# Altium PCB PCB.PcbDoc
Units mm, origin at the board's own origin, x right, y up, seen from the top; angles counter-clockwise.
Board outline 50 x 100 mm, 4 copper layers (Top Layer, MID1, MID2, Bottom Layer), stack 1.579 mm thick; 47 components, 38 nets, 220 pads, 108 vias.
Unrouted connection lines stored in the file: 73.
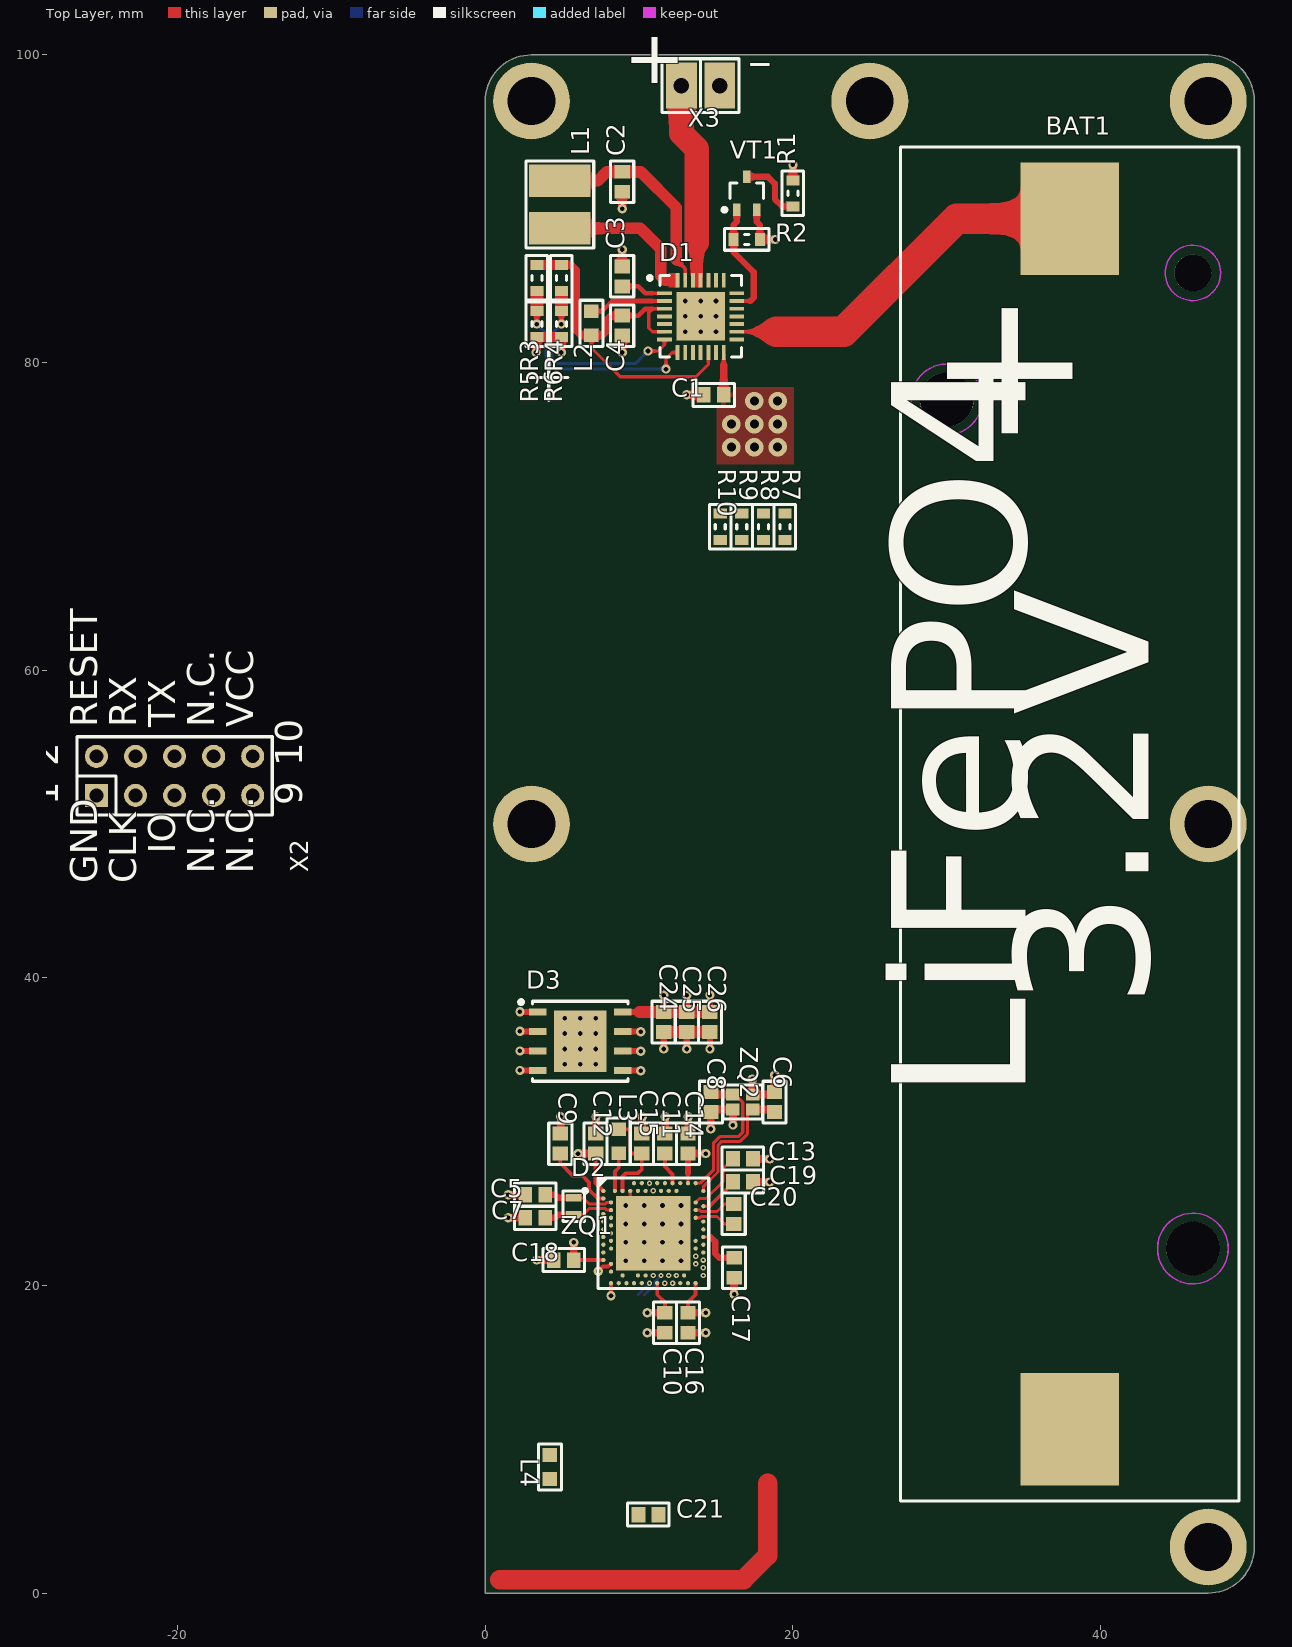
[diagram p0: Top Layer view]
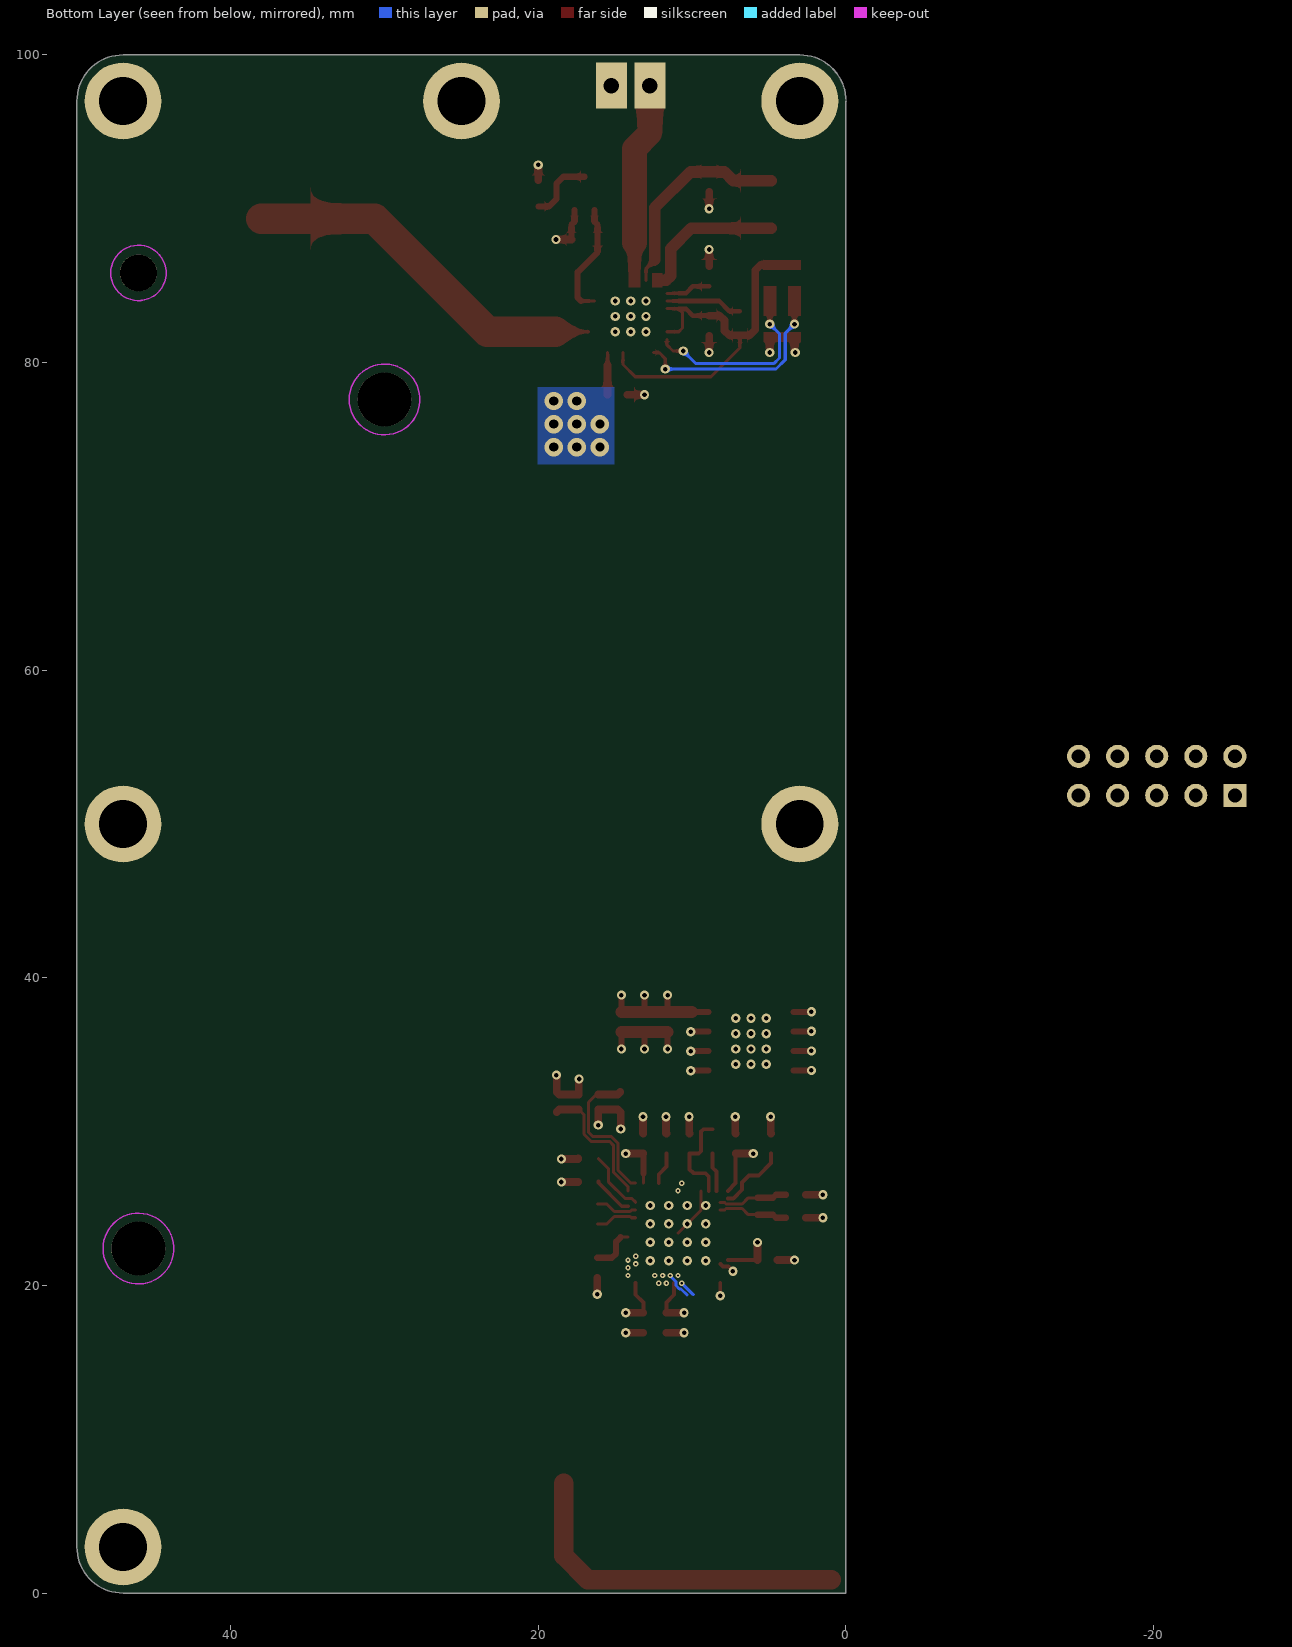
[diagram p1: Bottom Layer view, seen from below]
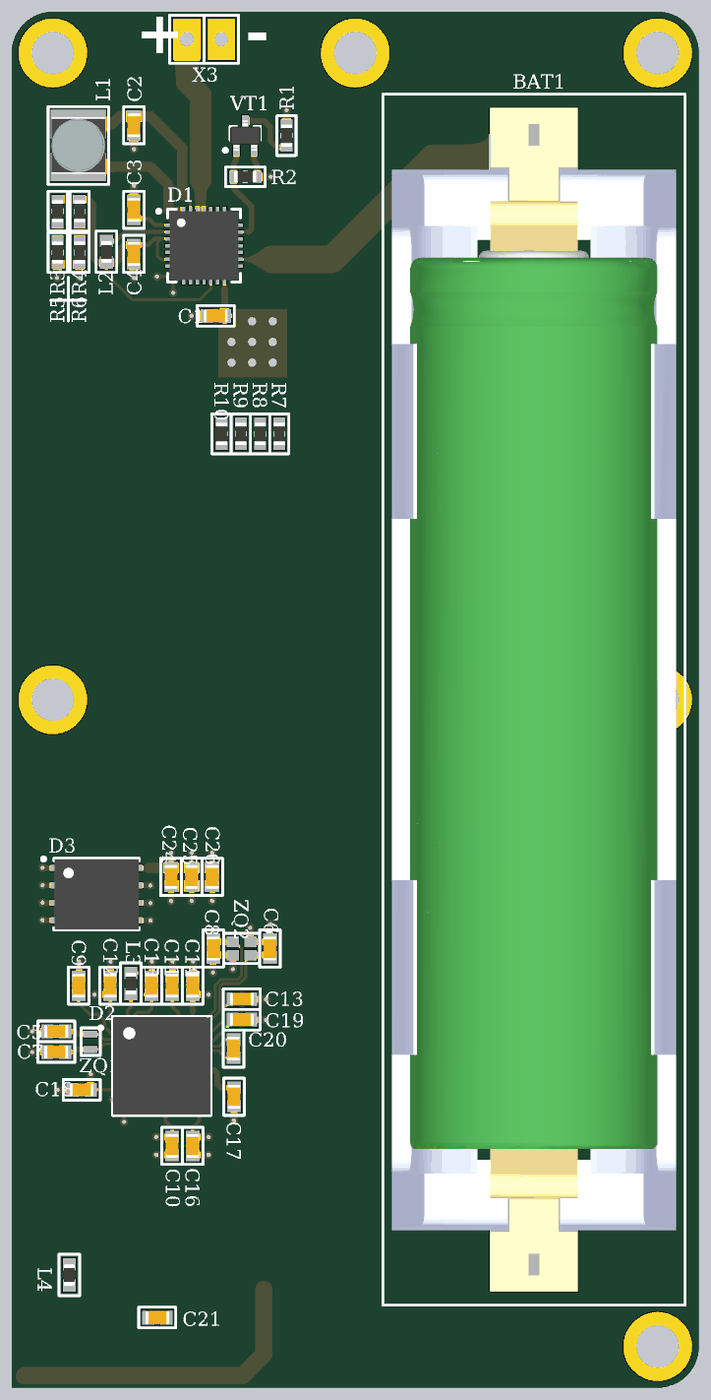
[diagram p2: 3D render of the assembled board from above, using the file's embedded part models]

## Layer stack, top to bottom
Top Solder: solder mask 0.0102, Solder Resist, Dk 3.5
Top Layer: signal copper 0.036
Dielectric 2: prepreg 0.0711, PP-006, Dk 4.1
MID1: signal copper 0.035
Dielectric 1: dielectric 1.295, FR-4, Dk 4.8
MID2: signal copper 0.035
Dielectric 3: prepreg 0.0711, PP-006, Dk 4.1
Bottom Layer: signal copper 0.036
Bottom Solder: solder mask 0.0102, Solder Resist, Dk 3.5

## Board outline
0,0 47,0 ccw(c47,3) 50,3 50,97 ccw(c47,97) 47,100 3,100 ccw(c3,97) 0,97

## Design rules (kind name [scope] priority, off if disabled: settings)
BoardOutlineClearance [All] p1: gap=0.3 ignorepadtopadclearanceinfootprint=FALSE
Clearance Clearance_MultiLayerPad [OnLayer('Multi-Layer') and IsPad] p1: gap=0.2 ignorepadtopadclearanceinfootprint=FALSE except(0: Arc-Hole Track-Hole SMDPad-Hole THPad-Hole Via-Hole Fill-Hole Poly-Hole Region-Hole Text-Hole)
Clearance Clearance_Polygon [InPolygon] p2: gap=0.1 ignorepadtopadclearanceinfootprint=FALSE except(0: Arc-Hole Track-Hole SMDPad-Hole THPad-Hole Via-Hole Fill-Hole Poly-Hole Region-Hole Text-Hole)
Clearance [All] p3: gap=0.1 ignorepadtopadclearanceinfootprint=FALSE except(0: Arc-Hole Track-Hole SMDPad-Hole THPad-Hole Via-Hole Fill-Hole Poly-Hole Region-Hole Text-Hole)
ComponentClearance [All] p1: gap=0.5 collisioncheckmode=3 verticalgap=0.5 showdistances=FALSE
DiffPairsRouting [All] p1: maxlimit=0.3 minlimit=0.1 mostfreqgap=0.15 toplayer_minwidth=0.1 toplayer_maxwidth=0.3 toplayer_prefwidth=0.15 midlayer1_minwidth=0.1 midlayer1_maxwidth=0.3 midlayer1_prefwidth=0.15 midlayer2_minwidth=0.1 midlayer2_maxwidth=0.3 midlayer2_prefwidth=0.15 bottomlayer_minwidth=0.1 bottomlayer_maxwidth=0.3 bottomlayer_prefwidth=0.15 maxuncoupledlength=12.7
Height [All] p1: minheight=0 maxheight=50 prefheight=12.7
HoleSize [All] p1: absolutevalues=TRUE maxlimit=10 minlimit=0.3 maxpercent=80.000 minpercent=20.000
HoleToHoleClearance [All] p1: gap=0.3 allowstackedmicrovias=TRUE
MinimumSolderMaskSliver [All] p1: minsoldermaskwidth=0.2
PlaneClearance [All] p1: clearance=0.5
PlaneConnect [All] p1: planeconnectstyle=Relief reliefexpansion=0.5 reliefentries=4 reliefconductorwidth=0.2 reliefairgap=0.2
PolygonConnect PolygonConnect_PadGND [InNet('GND') and IsPad] p1: connectstyle=Relief reliefconductorwidth=0.2 reliefentries=4 polygonreliefangle="90 Angle" airgapwidth=0.2
PolygonConnect PolygonConnect_Via [IsVia] p2: connectstyle=Direct reliefconductorwidth=0.254 reliefentries=4 polygonreliefangle="90 Angle" airgapwidth=0.254
PolygonConnect [All] p3: connectstyle=Relief reliefconductorwidth=0.2 reliefentries=4 polygonreliefangle="90 Angle" airgapwidth=0.2
RoutingVias [All] p1: holewidth=0.2 width=0.4 viastyle="Through Hole" minholewidth=0.2 minwidth=0.4 maxholewidth=0.5 maxwidth=1.2
SilkToSolderMaskClearance [IsPad] p1: minsilkscreentomaskgap=0.2 clearancetoexposedcopper=TRUE
SolderMaskExpansion [All] p1: expansion=0.075
Width Width_D2_pad [(ObjectKind = 'Pad') And (Component = 'D2')] p1: maxlimit=0.25 minlimit=0.25 preferedwidth=0.25
Width [All] p2: maxlimit=10 minlimit=0.1 preferedwidth=0.1
21 further rules are at their usual default settings.

## Classes and differential pairs
component class Analog: R7 R8 R9 R10
component class Energy_storage: BAT1
component class MPPT_controller: C1 C2 C3 C4 D1 L1 L2 R1 R2 R3 R4 R5 R6 VT1
component class Photovoltaics: X3
component class Power_and_clock: C5 C6 C7 C8 C9 C10 C11 C12 C13 C14 C15 C16 C17 C18 C19 D2 L3 ZQ1 ZQ2
component class Program_and_debug_interface: X2
component class QSPI_64Mbit_Flash: C24 C25 C26 D3
component class RF: C20 C21 L4
net class QSPI_SIO[0..3]: QSPI_SIO0 QSPI_SIO1 QSPI_SIO2 QSPI_SIO3

## Components (designator, comment, footprint, x,y, rotation, side; value= is the part's Value field where it differs from the comment)
BAT1 "\"18650 Batt. holder\"" 18650_smd_keystone_1042 38,50 r90 top
C1 "10 uF" CAPC1608X09N 14.85,77.9 r0 top
C2 "10 uF" CAPC1608X09N 8.9,91.75 r90 top
C3 "22 uF" CAPC1608X09N 8.9,85.6 r270 top
C4 "10 uF" CAPC1608X09N 8.9,82.4 r90 top
C5 "12pF" CAPC1608X09N 3.25,25.9 r0 top
C6 "12pF" CAPC1608X09N 18.8,31.925 r90 top
C7 "12pF" CAPC1608X09N 3.25,24.4 r0 top
C8 "12pF" CAPC1608X09N 14.675,31.925 r270 top
C9 "0.1uF" CAPC1608X09N 4.875,29.225 r90 top
C10 "0.1uF" CAPC1608X09N 11.675,17.575 r90 top
C11 "DNP" CAPC1608X09N 11.675,29.225 r90 top
C12 "1uF" CAPC1608X09N 7.175,29.225 r270 top
C13 "100pF" CAPC1608X09N 16.75,28.25 r0 top
C14 "0.1uF" CAPC1608X09N 13.175,29.225 r270 top
C15 "1uF" CAPC1608X09N 10.175,29.225 r90 top
C16 "0.1uF" CAPC1608X09N 13.175,17.575 r90 top
C17 "820pF" CAPC1608X09N 16.175,21.15 r270 top
C18 "4.7uF" CAPC1608X09N 5.1,21.65 r0 top
C19 "DNP" CAPC1608X09N 16.75,26.75 r0 top
C20 "0.8pF" CAPC1608X09N 16.15,24.65 r270 top
C21 "0.5pF" CAPC1608X09N 10.6,5.1 r180 top
C24 "0.1uF" CAPC1608X09N 11.6,37.125 r90 top
C25 "1uF" CAPC1608X09N 13.1,37.125 r270 top
C26 "4.7uF" CAPC1608X09N 14.6,37.125 r90 top
D1 "" QFN50P500X500X85_HS-29N 14,83 r0 top
D2 "NRF52840-QIAA-R" AQFN50P700X700X85_HS-74N 10.925,23.4 r0 top
D3 "MX25R6435FZNIL0" SON127P600X80_HS-9N 6.175,35.875 r0 top
L1 "10 uH 750 mA" INDP3939X11N 4.85,90.275 r270 top value="10 uH"
L2 "10 uH 250 mA" INDC1608X08N 6.9,82.55 r90 top value="10 uH"
L3 "10 uH 50 mA" INDC1608X08N 8.675,29.375 r270 top value="10 uH"
L4 "4.7nH" INDC1608X08N 4.2,8.2 r270 top
R1 "1M" RESC1608X05N 20,91 r270 top
R2 "1M" RESC1608X05N 17,88 r0 top
R3 "DNP" RESC1608X05N 3.35,85.5 r90 top
R4 "DNP" RESC1608X05N 4.95,85.5 r90 top
R5 "0R" RESC1608X05N 3.35,82.5 r90 top
R6 "0R" RESC1608X05N 4.95,82.5 r90 top
R7 "2M" RESC1608X05N 19.475,69.325 r90 top
R8 "2M" RESC1608X05N 18.075,69.325 r90 top
R9 "5.11M" RESC1608X05N 16.675,69.325 r270 top
R10 "5.11M" RESC1608X05N 15.275,69.325 r270 top
VT1 "DMG1012UW-7" SOT65P210X110-3N 17,91 r90 top
X2 "\"Program connector. Ver.1\"" "10-pin 2.54mm TH" -25.28,51.86 r90 top
X3 "\"Connector\"" "2-pin PCB power" 14,98 r0 top
ZQ1 "32.768 kHz" ECX-16 5.75,25.15 r90 top
ZQ2 "32.0000MHZ" ABM11W-32.0000MHZ-8-D1X-T3 16.738,31.925 r0 top value=32.0000MHz

## Footprints (in the part's own frame and the unit in brackets; to place one, negate y for a bottom-side part, rotate by r counter-clockwise, add the part's x,y. Pads: shape width x height; smd on the part's side, far side on the other; paste and mask are expansions set on the pad)
"2-pin PCB power" [mm]
  rect 2x3 hole 1: 1(-1.25,0) 2(1.25,0)
  silkscreen extent -2.5,-1.75 2.5,1.75
"10-pin 2.54mm TH" [mm]
  rect 1.5x1.5 hole 0.9: 1(0,0)
  round 1.5 hole 0.9: 2(2.54,0) 3(0,-2.54) 4(2.54,-2.54) 5(0,-5.08) 6(2.54,-5.08) 7(0,-7.62) 8(2.54,-7.62) 9(0,-10.16) 10(2.54,-10.16)
  silkscreen extent -1.27,-11.43 3.81,1.27
18650_smd_keystone_1042 [mm]
  round 3.5 hole 3.5 unplated: 0(-27.6,-8) 0(27.6,8)
  round 2.4 hole 2.4 unplated: 0(35.825,-8)
  rect 7.3x6.4 smd: 1(-39.35,0) 2(39.35,0)
  Keep-Out Layer circle w0.1: c27.6,8 r2.3
  Keep-Out Layer circle w0.1: c-27.6,-8 r2.3
  Keep-Out Layer circle w0.1: c35.825,-8 r1.8
  silkscreen extent -44,-11 44,11, body extent -43,-10.32 43,10.33, height 18.1
ABM11W-32.0000MHZ-8-D1X-T3 [mm]
  rect 0.875x0.775 smd: 1(-0.637,0.487) 2(0.637,0.487) 3(0.637,-0.487) 4(-0.637,-0.487)
  silkscreen extent -1.3,-1.1 1.3,1.1, body extent -1,-0.8 1,0.8, height 0.5
AQFN50P700X700X85_HS-74N [mm]
  rect 4.85x4.85 smd mask+0.05: 0(0,0)
  round 0.275 smd paste+0.012 mask+0.05: A8(-1.25,3.25) A10(-0.75,3.25) A12(-0.25,3.25) A14(0.25,3.25) A16(0.75,3.25) A18(1.25,3.25) A20(1.75,3.25) A22(2.25,3.25) A23(2.75,3.25) AA24(3.25,-2.25) AB2(-2.75,-2.5) AC5(-2,-2.75) AC9(-1,-2.75) AC11(-0.5,-2.75) AC13(0,-2.75) AC15(0.5,-2.75) AC17(1,-2.75) AC19(1.5,-2.75) AC21(2,-2.75) AC24(3.25,-2.75) AD2(-2.75,-3.25) AD4(-2.25,-3.25) AD6(-1.75,-3.25) AD8(-1.25,-3.25) AD10(-0.75,-3.25) AD12(-0.25,-3.25) AD14(0.25,-3.25) AD16(0.75,-3.25) AD18(1.25,-3.25) AD20(1.75,-3.25) AD22(2.25,-3.25) AD23(2.75,-3.25) B1(-3.25,2.75) B3(-2.5,2.75) B5(-2,2.75) B7(-1.5,2.75) B9(-1,2.75) B11(-0.5,2.75) B13(0,2.75) B15(0.5,2.75) B17(1,2.75) B19(1.5,2.75) B24(3.25,2.75) C1(-3.25,2.25) D2(-2.75,2) D23(2.75,2) E24(3.25,1.75) F2(-2.75,1.5) F23(2.75,1.5) G1(-3.25,1.25) H2(-2.75,1) H23(2.75,1) J1(-3.25,0.75) J24(3.25,0.75) K2(-2.75,0.5) L1(-3.25,0.25) L24(3.25,0.25) M2(-2.75,0) N1(-3.25,-0.25) N24(3.25,-0.25) P2(-2.75,-0.5) P23(2.75,-0.5) R1(-3.25,-0.75) R24(3.25,-0.75) T2(-2.75,-1) T23(2.75,-1) U1(-3.25,-1.25) U24(3.25,-1.25) V23(2.75,-1.5) W1(-3.25,-1.75) W24(3.25,-1.75) Y2(-2.75,-2) Y23(2.75,-2)
  silkscreen extent -4.56,-3.6 3.6,3.6, body extent -3.55,-3.55 3.55,3.55, height 0.85
CAPC1608X09N [mm] "Chip Capacitor, 2-Leads, Body 1,60x0,80mm, IPC Medium Density"
  rect 0.9x1 smd: 1(-0.65,0) 2(0.65,0)
  silkscreen extent -1.35,-0.75 1.35,0.75, body extent -0.87,-0.48 0.87,0.48, height 0.95
ECX-16 [mm]
  rect 0.5x1 smd: 1(-0.55,0) 2(0.55,0)
  silkscreen extent -1,-0.7 1,0.7, body extent -0.8,-0.5 0.8,0.5, height 0.5
INDC1608X08N [mm] "Chip Inductor, 2-Leads, Body 1,60x0,80mm, IPC Medium Density"
  rect 0.9x0.94 smd: 1(-0.78,0) 2(0.78,0)
  silkscreen extent -1.5,-0.75 1.5,0.75, body extent -0.8,-0.4 0.8,0.4, height 0.8
INDP3939X11N [mm] "Precision Wire Wound Inductor, 2-Leads, Body 3,90x3,90mm, IPC Medium Density, suitable for LPS4012-103MRB"
  rect 2.1x4 smd: 1(-1.55,0) 2(1.55,0)
  silkscreen extent -2.83,-2.2 2.83,2.2, body extent -2.05,-1.95 2.05,1.95, height 1.2
QFN50P500X500X85_HS-29N [mm] "QFN, 28-Leads, Body 5,00x5,00mm, Pitch 0,50mm, Thermal Pad 3,15x3,15mm, IPC Medium Density"
  rect 3.15x3.15 smd: 0(0,0)
  rect 0.95x0.25 smd: 1(-2.35,1.5) 2(-2.35,1) 3(-2.35,0.5) 4(-2.35,0) 5(-2.35,-0.5) 6(-2.35,-1) 7(-2.35,-1.5) 15(2.35,-1.5) 16(2.35,-1) 17(2.35,-0.5) 18(2.35,0) 19(2.35,0.5) 20(2.35,1) 21(2.35,1.5)
  rect 0.25x0.95 smd: 8(-1.5,-2.35) 9(-1,-2.35) 10(-0.5,-2.35) 11(0,-2.35) 12(0.5,-2.35) 13(1,-2.35) 14(1.5,-2.35) 22(1.5,2.35) 23(1,2.35) 24(0.5,2.35) 25(0,2.35) 26(-0.5,2.35) 27(-1,2.35) 28(-1.5,2.35)
  silkscreen extent -3.42,-2.65 2.65,2.65, body extent -2.52,-2.52 2.52,2.52, height 0.85
RESC1608X05N [mm] "Chip Resistor, 2-Leads, Body 1,60x0,80mm, IPC Medium Density"
  rect 0.65x0.85 smd: 1(-0.85,0) 2(0.85,0)
  silkscreen extent -1.45,-0.7 1.45,0.7, body extent -0.8,-0.4 0.8,0.4, height 0.45
SON127P600X80_HS-9N [mm]
  rect 3.4x4 smd paste-1.7: 0(0,0)
  rect 1.15x0.45 smd: 1(-2.77,1.905) 2(-2.77,0.635) 3(-2.77,-0.635) 4(-2.77,-1.905) 5(2.77,-1.905) 6(2.77,-0.635) 7(2.77,0.635) 8(2.77,1.905)
  silkscreen extent -3.97,-2.6 3.1,2.67, body extent -3.05,-2.55 3.05,2.55, height 0.8
SOT65P210X110-3N [mm] "SOT23, 3-Leads, Body 2,00x2,10mm, Pitch 0,65mm, IPC Medium Density"
  rect 0.8x0.5 smd: 1(-1.075,0.65) 2(-1.075,-0.65) 3(1.075,0)
  silkscreen extent -1.2,-1.1 0.67,1.57, body extent -1.1,-1.1 1.1,1.1, height 1.1

## Part data
BAT1: library part SMD_battery_holder_18650, "Battery holder 18650 SMD.", Case=18650, Manufacturer="Keystone Electronics", Operation Temperature=-50...+145, PartNumber=1042, Help URL=https://www.digikey.com/en/products/detail/keystone-electronics/1042/2745668, Type="battery holder"
C1 C2 C4: library part Ceramic, "Ceramic capacitor", Case=0603, Manufacturer="Murata Electronics", Operation Temperature=-55...+85, PartNumber=GRM188R61A106ME69D, Power/Voltage="10 VDC", Tolerance="20 %", Help URL=https://eu.mouser.com/ProductDetail/Murata-Electronics/GRM188R61A106ME69D?qs=o98hbGm2QKGN31NsNZp5HQ%3D%3D, Note="X5R, General purpose", Type="ceramic capacitor"
C3: library part Ceramic, "Ceramic capacitor", Case=0603, Manufacturer="Murata Electronics", Operation Temperature=-55...+85, PartNumber=GRM188R61A226ME15D, Power/Voltage="10 VDC", Tolerance="20 %", Help URL=https://eu.mouser.com/ProductDetail/Murata-Electronics/GRM188R61A226ME15D?qs=eeBpzGFlv%252B8DV%2FrilzyhAw%3D%3D, Note="X5R, General purpose", Type="ceramic capacitor"
C5 C6 C7 C8: library part Ceramic, "Ceramic capacitor", Case=0603, Manufacturer=Yageo, Operation Temperature=-55...+125, PartNumber=CC0603JRNPO9BN120, Power/Voltage=50V, Tolerance=5%, Help URL=https://www.digikey.com/en/products/detail/yageo/CC0603JRNPO9BN120/302793, Type=capacitor
C9 C10 C14 C16 C24: library part Ceramic, "Ceramic capacitor", Case=0603, Manufacturer="Wurth Elektronik", Operation Temperature=-55...+125, PartNumber=885012206071, Power/Voltage=25V, Tolerance=10%, Help URL=https://www.digikey.com/en/products/detail/w%C3%BCrth-elektronik/885012206071/5453844, Type=capacitor
C11 C19: library part Ceramic, "Ceramic capacitor", Case=0603, Type=capacitor
C12 C15 C25: library part Ceramic, "Ceramic capacitor", Case=0603, Manufacturer="Wurth Elektronik", Operation Temperature=-55...+85, PartNumber=885012106010, Power/Voltage=10V, Tolerance=20%, Help URL=https://www.digikey.com/en/products/detail/w%C3%BCrth-elektronik/885012106010/5453762, Type=capacitor
C13: library part Ceramic, "Ceramic capacitor", Case=0603, Manufacturer="Wurth Elektronik", Operation Temperature=-55...+125, PartNumber=885342006003, Power/Voltage=250V, Tolerance=5%, Help URL=https://www.digikey.com/en/products/detail/w%C3%BCrth-elektronik/885342006003/9345979, Type=capacitor
C17: library part Ceramic, "Ceramic capacitor", Case=0603, Manufacturer=Yageo, Operation Temperature=-55...+125, PartNumber=CC0603KRX7R9BB821, Power/Voltage=50V, Tolerance=10%, Help URL=https://www.digikey.com/en/products/detail/yageo/CC0603KRX7R9BB821/372862, Type=capacitor
C18 C26: library part Ceramic, "Ceramic capacitor", Case=0603, Manufacturer="Wurth Elektronik", Operation Temperature=-55...+85, PartNumber=885012106005, Power/Voltage=6.3V, Tolerance=20%, Help URL=https://www.digikey.com/en/products/detail/w%C3%BCrth-elektronik/885012106005/5453757, Type=capacitor
C20: library part Ceramic, "Ceramic capacitor", Case=0603, Manufacturer="Murata Electronics", Operation Temperature=-55...+125, PartNumber=GQM1875C2ER80BB12D, Power/Voltage=250V, Tolerance=0.1pF, Help URL=https://www.digikey.com/en/products/detail/murata-electronics/GQM1875C2ER80BB12D/11618603, Type=capacitor
C21: library part Ceramic, "Ceramic capacitor", Case=0603, Manufacturer="Murata Electronics", Operation Temperature=-55...+125, PartNumber=GQM1875C2ER50WB12D, Power/Voltage=250V, Tolerance=0.05pF, Help URL=https://www.digikey.com/en/products/detail/murata-electronics/GQM1875C2ER50WB12D/11618602, Type=capacitor
D1: library part AEM10941-QFN28, "Intergated energy management circuit that extracts DC power from up to 7-cell solar panels. With MPPT controller.", Manufacturer=e-peas, Operation Temperature="-40...+125 °C", PartNumber=AEM10941-QFN, Power/Voltage=550mW, Help URL=https://eu.mouser.com/ProductDetail/e-peas/AEM10941-QFN?qs=W%2FMpXkg%252BdQ7CeqB2lBPbRQ%3D%3D, Type="PV energy harvester"
D2: library part nRF52840-QFN373, "IC RF TxRx + MCU 802.15.4, Bluetooth Bluetooth v5.0 2.4GHz 73-VFQFN Dual Rows, Exposed Pad", Case="73-aQFN (7x7)", Manufacturer="Nordic Semiconductor ASA", Operation Temperature=-40...+85, Power/Voltage="1.7V ~ 5.5V", Help URL=https://www.digikey.com/en/products/detail/nexperia-usa-inc/2N7002-215/762973, PartNumber=NRF52840-QIAA-R, Type="IC RF TXRX+MCU 802.15.4"
D3: "FLASH - NOR Memory IC 64Mb (8M x 8) SPI - Quad I/O 8-WSON (6x5)", Case="8-WSON (6x5)", Manufacturer=Macronix, Operation Temperature=-40...+85, Power/Voltage="1.65V ~ 3.6V", Help URL=https://www.digikey.com/en/products/detail/macronix/MX25R6435FZNIL0/6558605?s=N4IgTCBcDaILIA0wFYBKA2ALAZmQMQC0A5ASQBkAGEAXQF8g, PartNumber=MX25R6435FZNIL0, Type="FLASH - NOR"
L1: library part Inductor, "Inductor", Case=1515, Manufacturer=Coilcraft, Maximum DC Current="750 mA", Maximum DC Resistance="350 mOhm", Operation Temperature=-40...+85, PartNumber=LPS4012-103MRB, Saturation Current="1.1 A", Tolerance="20 %", Help URL=https://eu.mouser.com/ProductDetail/Coilcraft/LPS4012-103MRB?qs=QQJxVsr8EGamsM0letHvkQ%3D%3D, Type=inductor
L2: library part Inductor, "Inductor", Case=0603, Manufacturer=TDK, Maximum DC Current="250 mA", Maximum DC Resistance="1.05 Ohm", Operation Temperature=-55...+125, PartNumber=MLZ1608M100WT000, Saturation Current="90 mA", Tolerance="20 %", Help URL=https://eu.mouser.com/ProductDetail/TDK/MLZ1608M100WT000?qs=%2Fha2pyFaduj6%252B0RWY0sGlNh8Rxwgn4kiVfSaAvWnFwX0N61hyAW%252BjQ%3D%3D, Type=inductor
L3: library part Inductor, "Inductor", Case=0603, Manufacturer="Murata Electronics", Maximum DC Current="50 mA", Maximum DC Resistance="1.17 Ohm", Operation Temperature=-55...+125, PartNumber=LQM18FN100M00D, Tolerance="20 %", Help URL=https://www.digikey.com/en/products/detail/murata-electronics/LQM18FN100M00D/1016184, Saturation Current="50 mA", Type=inductor
L4: library part Inductor, "Inductor", Case=0603, Frequency self resonant=5.5GHz, Manufacturer="AVX Corporation", Maximum DC Current=500mA, Maximum DC Resistance="150 mOhm", Operation Temperature=-55...+125, PartNumber=L06034R7CGSTR, Q @ freq="23 @ 450MHz", Tolerance=0.2nH, Help URL=https://www.digikey.com/en/products/detail/avx-corporation/L06034R7CGSTR/1531806, Type=inductor
R1 R2: library part resistor_smd, "SMD resistor", Case=0603, Manufacturer=Yageo, Operation Temperature=-55...+155, PartNumber=RC0603JR-071ML, Power/Voltage=1/10W, Tolerance=5%, Help URL=https://www.digikey.com/en/products/detail/yageo/RC0603JR-071ML/726678, Note="Thick film", Type=resistor
R3 R4 R5 R6: library part resistor_smd, "SMD resistor", Case=0603, Manufacturer=Yageo, Operation Temperature=-55...+155, PartNumber=AC0603FR-070RL, Power/Voltage="1/10 W, 75 V", Tolerance="1 %", Help URL=https://eu.mouser.com/ProductDetail/Yageo/AC0603FR-070RL?qs=sGAEpiMZZMtlubZbdhIBIOG3KwTtqrl%2FD2D%252BGuMCfoY%3D, Type="resistor, Thick Film General Purpose"
  R3 R4: Note=DNP
R7 R8: library part resistor_smd, "SMD resistor", Case=0603, Manufacturer=Yageo, Operation Temperature=-55...+155, PartNumber=RC0603JR-072ML, Power/Voltage=1/10W, Tolerance=5%, Help URL=https://www.digikey.com/en/products/detail/yageo/RC0603JR-072ML/726727, Type=resistor
R9 R10: library part resistor_smd, "SMD resistor", Case=0603, Manufacturer=Yageo, Operation Temperature=-55...+155, PartNumber=RC0603FR-075M11L, Power/Voltage=1/10, Tolerance=1%, Help URL=https://www.digikey.com/en/products/detail/yageo/RC0603FR-075M11L/5918377, Type=resistor
VT1: library part "DMF1012UW N-channel MOSFET", "MOSFET DMG1012UW , N-channel, 20V, 1A", Case=SOT323, Manufacturer="Diodes Incorporated", Operation Temperature=-55...+150, Power/Voltage="20V, 290mW", Help URL=https://www.digikey.com/en/products/detail/diodes-incorporated/DMG1012UW-7/2183239?s=N4IgTCBcDaICYFsDmBGADCsBXA7iAugL5A, PartNumber=DMG1012UW-7, Type="MOSFET N-channel"
X2: library part "10-pin program connector. Ver.1", "10-pin custom fixed layout program and debug connector."
X3: library part "2-pin Power ConnectorSolderPCB", "Power connector. Solder on PCB."
ZQ1: library part ECS-.327-9-16-TR, "CRYSTAL 32.7680KHZ 9PF SMD ±20ppm Crystal 9pF 2-SMD, No Lead", Case="2-SMD, No Lead", Manufacturer="ECS Inc.", Operation Temperature=-40...+85, Tolerance=20ppm, Help URL=https://www.digikey.com/en/products/detail/ecs-inc/ECS-327-9-16-TR/5875558, PartNumber=ECS-.327-9-16-TR, Type="crystal oscillator, tunning fork"
ZQ2: library part ABM11W-32.0000MHZ-8-D1X-T3, "CRYSTAL 32.0000MHZ 8PF SMD, ±10ppm Crystal 8pF 4-SMD, No Lead", Case="4-SMD, No Lead", Manufacturer="Abracon LLC", Operation Temperature=-40...+85, Tolerance=10ppm, Help URL=https://www.digikey.com/en/products/detail/abracon-llc/ABM11W-32-0000MHZ-8-D1X-T3/7172671, PartNumber=ABM11W-32.0000MHZ-8-D1X-T3, Type="crystal oscillator"

## Free pads (board coordinates)
  round 5 hole 3.1: ""(3,50) ""(3,97) ""(25,97) ""(47,3) ""(47,50) ""(47,97)

## Via types
v1: diameter 0.6, hole 0.3, Top Layer to Bottom Layer, tented both sides, 49 vias
v2: diameter 0.61, hole 0.305, Top Layer to Bottom Layer, 16 vias
v3: diameter 0.35, hole 0.15, Top Layer to Bottom Layer, 14 vias
v4: diameter 0.61, hole 0.305, Top Layer to Bottom Layer, tented bottom, 12 vias
v5: diameter 0.6, hole 0.3, Top Layer to Bottom Layer, 9 vias
v6: diameter 1.2, hole 0.6, Top Layer to Bottom Layer, tented both sides, 8 vias

## Nets (pads, with @x,y where several pads share a name; then routed paths per layer and width w, separated by ;. In a path a pad name is that pad's centre, name@x,y a point inside that pad or via, vN(x,y) a via of type N, cw(c..) or ccw(c..) an arc to the next point about the centre after c; other vN are vias at no path point)
ANT: C21.2 L4.2 | length 22.7
  Top Layer w1.27: 0.949,0.877 16.791,0.877 18.35,2.436 18.35,7.125
BATT: BAT1.2 D1.16 R8.2 | length 24.3
  Top Layer w0.2: D1.16@16.75,82 18.925,82
  Top Layer w2: 18.925,82 23.3,82 30.65,89.35 BAT1.2
BOOST: C3.2 D1.1 | length 2.9
  Top Layer w0.2: 10.875,84.5 D1.1
  Top Layer w0.3: C3.2 9.95,84.95 10.4,84.5 10.875,84.5
BUCK: C4.2 D1.3 D1.6 D1.12 L2.1 R3.2 R4.2 | length 24.8
  Top Layer w0.2: L2.1 6.9,80.95 8.775,79.075 13.7,79.075 14.5,79.875 D1.12 ; D1.6 10.875,82 10.625,82.25 10.625,83.25 10.875,83.5 D1.3
  Top Layer w0.3: C4.2 9.95,83.05 10.4,83.5 10.875,83.5
  Top Layer w0.5: R4.2 5.55,86.35 5.9,86 5.9,82.125 6.255,81.77 L2.1 7.595,81.77 7.9,82.075 7.9,82.75 8.2,83.05 C4.2
BUFSCR: C2.2 D1.27 L1.1 | length 13.7
  Top Layer w0.2: 12.425,86.675 13,86.1 D1.27
  Top Layer w0.75: L1.1 7.325,91.825 7.9,92.4 C2.2 10.1,92.4 12.425,90.075 12.425,86.675
DEC1: C9.1 D2.C1 | length 4.7
  Top Layer w0.25: C9.1 4.875,27.95 5.675,27.15 6.3,27.15 6.75,26.7 6.75,26.225 7.325,25.65 D2.C1
DEC2: C11.1 D2.A18 | length 2.1
  Top Layer w0.25: C11.1 11.675,27.725 12.175,27.225 D2.A18
DEC3: C13.1 D2.D23 | length 4.1
  Top Layer w0.2: D2.D23 13.925,25.65 14.35,25.65 15.45,26.75 15.45,27.6 C13.1
DEC4: C15.1 C19.1 D2.B5 D2.E24 L3.1 | length 8.9
  Top Layer w0.25: L3.1 9.27,30.155 9.425,30 9.425,28.725 9.575,28.575 C15.1 10.175,27.55 9.925,27.3 9.15,27.3 8.925,27.075 D2.B5 ; D2.E24 14.575,25.15 16.1,26.675 C19.1
DEC5: C17.1 D2.N24 | length 3
  Top Layer w0.2: D2.N24 14.65,23.15
  Top Layer w0.4: 14.65,23.15 14.95,22.85 14.95,22.075 15.225,21.8 C17.1
GND: BAT1.1 C1.1 C2.1 C3.1 C4.1 C5.1 C6.2 C7.1 C8.2 C9.2 C10.1 C11.2 C12.1 C13.2 C14.1 C15.2 C16.1 C17.2 C18.1 C19.2 C20.1 C21.1 C24.1 C25.2 C26.1 D1.0 D1.4 D1.5 D1.18 D2.0 D2.AD2 D2.B7 D2.F23 D3.0 D3.4 pad. R2.2 R5.1 R6.1 R9.1 R10.1 VT1.2 X2.1 X3.2 ZQ2.2 ZQ2.4 | length 45.5
  Top Layer w0.2: D2.B7 9.425,24.9 D2.0 ; D2.F23 13.948,24.9 14.035,24.813 15.063,24.813 15.55,25.3 C20.1
  Top Layer w0.25: v1(8.175,19.325) D2.AD2
  Top Layer w0.4: v1(2.25,33.98) 3.395,33.98 D3.4 ; v1(11.6,35.375) C24.1 ; v1(13.1,35.375) C25.2 ; v1(14.6,35.375) C26.1 ; VT1.2 17.65,89.15 17.85,88.95 R2.2
  Top Layer w0.5: v1(1.5,24.4) C7.1 ; v1(1.5,25.9) C5.1 ; v1(3.3,80.654) 3.35,80.704 R5.1 ; v1(3.35,21.65) C18.1 ; C9.2 4.9,29.9 v1(4.9,30.975) ; v1(4.95,80.65) R6.1 ; C12.1 7.2,29.9 v1(7.2,30.975) ; v1(8.9,80.65) C4.1 ; C3.1 v1(8.9,87.35) ; v1(8.9,90) C2.1 ; C15.2 10.2,29.9 v1(10.2,30.975) ; v1(10.525,16.925) C10.1 ; C11.2 11.7,29.9 v1(11.7,30.975) ; v1(13.1,77.9) C1.1 ; C16.1 v1(14.325,16.925) ; C14.1 13.2,29.9 v1(13.2,30.975) ; v1(14.65,30.175) 14.65,31.25 C8.2 14.838,31.438 ZQ2.4 v1(16.1,30.425) ; v1(16.175,19.425) C17.2 ; v1(17.35,33.425) 17.375,33.4 ZQ2.2 18.638,32.413 C6.2 18.8,33.65 v1(18.825,33.675) ; C19.2 17.425,26.725 v1(18.5,26.725) ; C13.2 17.425,28.225 v1(18.5,28.225) ; R2.2 v1(18.85,88)
  Top Layer w0.8: C24.1 C25.2 C26.1
  other v2: 9.125,21.6 10.325,21.6 11.525,21.6 12.725,21.6 9.125,22.8 10.325,22.8 11.525,22.8 12.725,22.8 9.125,24 10.325,24 11.525,24 12.725,24 9.125,25.2 10.325,25.2 11.525,25.2 12.725,25.2
  other v4: 5.175,34.375 6.175,34.375 7.175,34.375 5.175,35.375 6.175,35.375 7.175,35.375 5.175,36.375 6.175,36.375 7.175,36.375 5.175,37.375 6.175,37.375 7.175,37.375
  other v5: 13,82 14,82 15,82 13,83 14,83 15,83 13,84 14,84 15,84
NetC5_2: C5.2 D2.D2 ZQ1.2 | length 4.6
  Top Layer w0.2: ZQ1.2 6.35,25.7 6.75,25.3 7.802,25.3 7.902,25.4 D2.D2
  Top Layer w0.4: C5.2 4.55,25.9 4.75,25.7 ZQ1.2
NetC6_1: C6.1 D2.B24 ZQ2.3 | length 8.8
  Top Layer w0.2: D2.B24 14.175,26.426 15.125,27.376 15.125,29.126 15.371,29.372 16.572,29.372 17.038,29.838 17.038,31.1 ZQ2.3
  Top Layer w0.5: ZQ2.3 18.638,31.438 C6.1
NetC7_2: C7.2 D2.F2 ZQ1.1 | length 4.6
  Top Layer w0.2: ZQ1.1 6.35,24.6 6.75,25 7.802,25 7.902,24.9 D2.F2
  Top Layer w0.4: C7.2 4.55,24.4 4.75,24.6 ZQ1.1
NetC8_1: C8.1 D2.A23 ZQ2.1 | length 9.7
  Top Layer w0.2: D2.A23 13.975,26.65 14.825,27.5 14.825,29.25 15.247,29.672 16.448,29.672 16.738,29.962 16.738,31.908 16.233,32.413 ZQ2.1
  Top Layer w0.5: C8.1 14.838,32.413 ZQ2.1
NetC20_2: C20.2 D2.H23 L4.1 | length 2.7
  Top Layer w0.2: D2.H23 13.948,24.4 14.035,24.488 15.063,24.488 15.55,24 C20.2
NetD1_20: D1.20 R2.1 VT1.1 | length 7.5
  Top Layer w0.2: D1.20 17.225,84
  Top Layer w0.4: VT1.1 16.35,89.15 16.15,88.95 R2.1 16.15,87.175 17.45,85.875 17.45,84.225 17.225,84
NetD2_A12: D2.A12 R7.1 R9.2
  other v3: 10.675,26.65
NetD2_B3: D2.B3 L3.2 | length 2.5
  Top Layer w0.25: D2.B3 8.425,27.4 8.675,27.65 L3.2
NetD2_B13: D2.B13 R8.1 R10.2
  other v3: 10.925,26.15
PV+: D1.25 D1.26 R7.2 X3.1 | length 13.1
  Top Layer w0.75: 13.75,85.325 13.75,87.775
  Top Layer w1.6: X3.1 12.75,94.9 13.75,93.9 13.75,87.775
QSPI_CS#: D2.AD12 D3.1 | length 2.2
  Top Layer w0.4: v1(2.25,37.79) 2.26,37.78 D3.1
  Bottom Layer w0.2: 9.925,19.4 v3(10.675,20.15)
QSPI_SCLK: D2.AC15 D3.6 | length 3
  Top Layer w0.4: D3.6 10.09,35.24 v1(10.1,35.23)
  Bottom Layer w0.2: 10.325,19.375 10.724,19.775 10.83,19.775 11.05,19.995 11.05,20.245 11.425,20.62 v3(11.425,20.65)
QSPI_SIO0: D2.AD16 D3.5 | length 1.2
  Top Layer w0.4: D3.5 10.09,33.97 v1(10.1,33.96)
  other v3: 11.675,20.15
QSPI_SIO1: D2.AC17 D3.2 | length 1.2
  Top Layer w0.4: v1(2.25,36.52) 2.26,36.51 D3.2
  other v3: 11.925,20.65
QSPI_SIO2: D2.AD18 D3.3 | length 1.2
  Top Layer w0.4: v1(2.25,35.25) 2.26,35.24 D3.3
  other v3: 12.175,20.15
QSPI_SIO3: D2.AC19 D3.7 | length 1.2
  Top Layer w0.4: D3.7 10.09,36.51 v1(10.1,36.5)
  other v3: 12.425,20.65
RESET: D2.AC13 X2.2
  other v3: 10.925,20.65
SELMPP0: D1.8 R3.1 R5.2 | length 13.1
  Top Layer w0.2: v1(11.75,79.575) 11.75,80.25 12.15,80.65 D1.8
  Top Layer w0.3: v1(3.35,82.5) R5.2
  Bottom Layer w0.2: v1(3.35,82.5) 3.95,81.9 3.95,80.18 4.555,79.575 v1(11.75,79.575)
SELMPP1: D1.7 R4.1 R6.2 | length 11.6
  Top Layer w0.2: v1(10.575,80.75) 11.25,80.75 11.65,81.15 D1.7
  Top Layer w0.3: v1(4.95,82.5) R6.2
  Bottom Layer w0.2: v1(4.95,82.5) 4.325,81.875 4.325,80.3 4.7,79.925 9.75,79.925 v1(10.575,80.75)
STATUS1: D2.V23 R1.2 VT1.3 | length 4.4
  Top Layer w0.4: VT1.3 18.375,92.075 18.825,91.625 18.825,90.625 19.3,90.15 R1.2
  other v3: 13.675,21.9
SWBOOST: D1.28 L1.2 | length 9.8
  Top Layer w0.75: L1.2 10.075,88.725 11.4,87.4 11.4,85.65 11.7,85.35 12.225,85.35
SWBUCK: D1.2 L2.2 | length 5
  Top Layer w0.2: 10.875,84 D1.2
  Top Layer w0.3: L2.2 7.58,83.33 8.25,84 10.875,84
SWD_CLK: D2.AA24 X2.3
  other v3: 14.175,21.15
SWD_IO: D2.AC24 X2.5
  other v3: 14.175,20.65
UART_RX: D2.Y23 X2.4
  other v3: 13.675,21.4
UART_TX: D2.W24 X2.6
  other v3: 14.175,21.65
VDD: C1.2 C10.2 C12.2 C14.2 C16.2 C18.2 C24.2 C25.1 C26.2 D1.14 D2.A22 D2.AD14 D2.AD23 D2.B1 D2.W1 D2.Y2 D3.8 R1.1 X2.10 | length 30.2
  Top Layer w0.2: D2.A22 13.175,27.3 ; 15.5,79.825 D1.14
  Top Layer w0.25: C18.2 D2.W1 ; C12.2 7.175,26.65 D2.B1 ; v1(7.35,20.925) 7.65,21.225 7.987,21.225 8.162,21.4 D2.Y2 ; D2.AD14 11.175,19.4 11.675,18.9 C10.2 ; C16.2 13.175,18.9 13.675,19.4 D2.AD23
  Top Layer w0.4: D3.8 10.025,37.78 ; C24.2 v1(11.6,38.875) ; C25.1 v1(13.1,38.875) ; 13.175,27.3 C14.2 ; C26.2 v1(14.6,38.875)
  Top Layer w0.5: C18.2 v1(5.75,22.8) ; v1(6.025,28.575) C12.2 ; v1(10.525,18.225) C10.2 ; C16.2 v1(14.325,18.225) ; C14.2 v1(14.325,28.575) ; C1.2 15.5,79.825 ; R1.1 v1(20,92.85)
  Top Layer w0.8: 10.025,37.78 10.03,37.775 C24.2 C26.2
  other v6: 16,74.5 17.5,74.5 19,74.5 16,76 17.5,76 19,76 17.5,77.5 19,77.5
pads on no net: BAT1.0 D1.9 D1.10 D1.11 D1.13 D1.15 D1.17 D1.19 D1.21 D1.22 D1.23 D1.24 D2.A8 D2.A10 D2.A14 D2.A16 D2.A20 D2.AB2 D2.AC5 D2.AC9 D2.AC11 D2.AC21 D2.AD4 D2.AD6 D2.AD8 D2.AD10 D2.AD20 D2.AD22 D2.B9 D2.B11 D2.B15 D2.B17 D2.B19 D2.G1 D2.H2 D2.J1 D2.J24 D2.K2 D2.L1 D2.L24 D2.M2 D2.N1 D2.P2 D2.P23 D2.R1 D2.R24 D2.T2 D2.T23 D2.U1 D2.U24 X2.7 X2.8 X2.9

## Polygon pours and split planes (outlines as drawn)
VDD on Top Layer "VDD-TOP" (solid, pour order 5): 15.05,78.4 15.05,73.4 20.05,73.4 20.05,78.4
VDD on Bottom Layer "VDD-BOTTOM" (solid, pour order 7): 15.05,73.4 15.05,78.4 20.05,78.4 20.05,73.4

## Other copper
Top Layer:
  rectangle net GND: 2.925,81.325 5.375,81.975
  rectangle net BUCK: 2.925,86.025 5.375,86.675
  rectangle net SELMPP1: 4.525,83.025 5.375,84.975
  rectangle net SELMPP0: 2.925,83.025 3.775,84.975
  rectangle net SWBOOST: 11.925,84.875 12.625,85.825
  rectangle net PV+: 13.375,84.875 14.125,85.825

## Silkscreen, mask and mechanical layers (free items; w line width, h text height)
Top Overlay:
  lines w0.2: 2.85,79.025 5.375,79.025 ; 4.125,77.525 4.125,80.7
  text "+" at 9,97 h6
  text "-" at 17,97 h6
Border:
  the board outline again, w0.2

## Text inside footprints (layer, text, board x,y; h text height)
BAT1: Top Overlay "+" at 42,74 h20 r90; Top Overlay "-" at 41,20 h20 r90; Top Overlay "LiFePO4" at 38,32 h15 r90; Top Overlay "3.2V" at 46,38 h15 r90
X2: Top Overlay "10" at -11.31,53.765 h3 r90; Top Overlay "9" at -11.31,51.225 h3 r90; Top Overlay "2" at -27.185,53.765 h3 r90; Top Overlay "1" at -27.185,51.225 h3 r90; Top Overlay "GND" at -24.645,46.145 h3 r90; Top Overlay "RESET" at -24.645,56.305 h3 r90; Top Overlay "CLK" at -22.105,46.145 h3 r90; Top Overlay "IO" at -19.565,48.05 h3 r90; Top Overlay "RX" at -22.105,56.305 h3 r90; Top Overlay "TX" at -19.565,56.305 h3 r90; Top Overlay "N.C." at -17.025,46.78 h3 r90; Top Overlay "N.C." at -14.485,46.78 h3 r90; Top Overlay "N.C." at -17.025,56.305 h3 r90; Top Overlay "VCC" at -14.485,56.305 h3 r90